# Altium PCB Embedded_board.PcbDoc (part 2 of 2)
Units mil, origin at the board's own origin, x right, y up, seen from the top; angles counter-clockwise.
Board outline 9840 x 5512.03 mil, 4 copper layers (Top Layer, Ground, Power, Bottom Layer); 264 components, 205 nets, 936 pads, 244 vias.
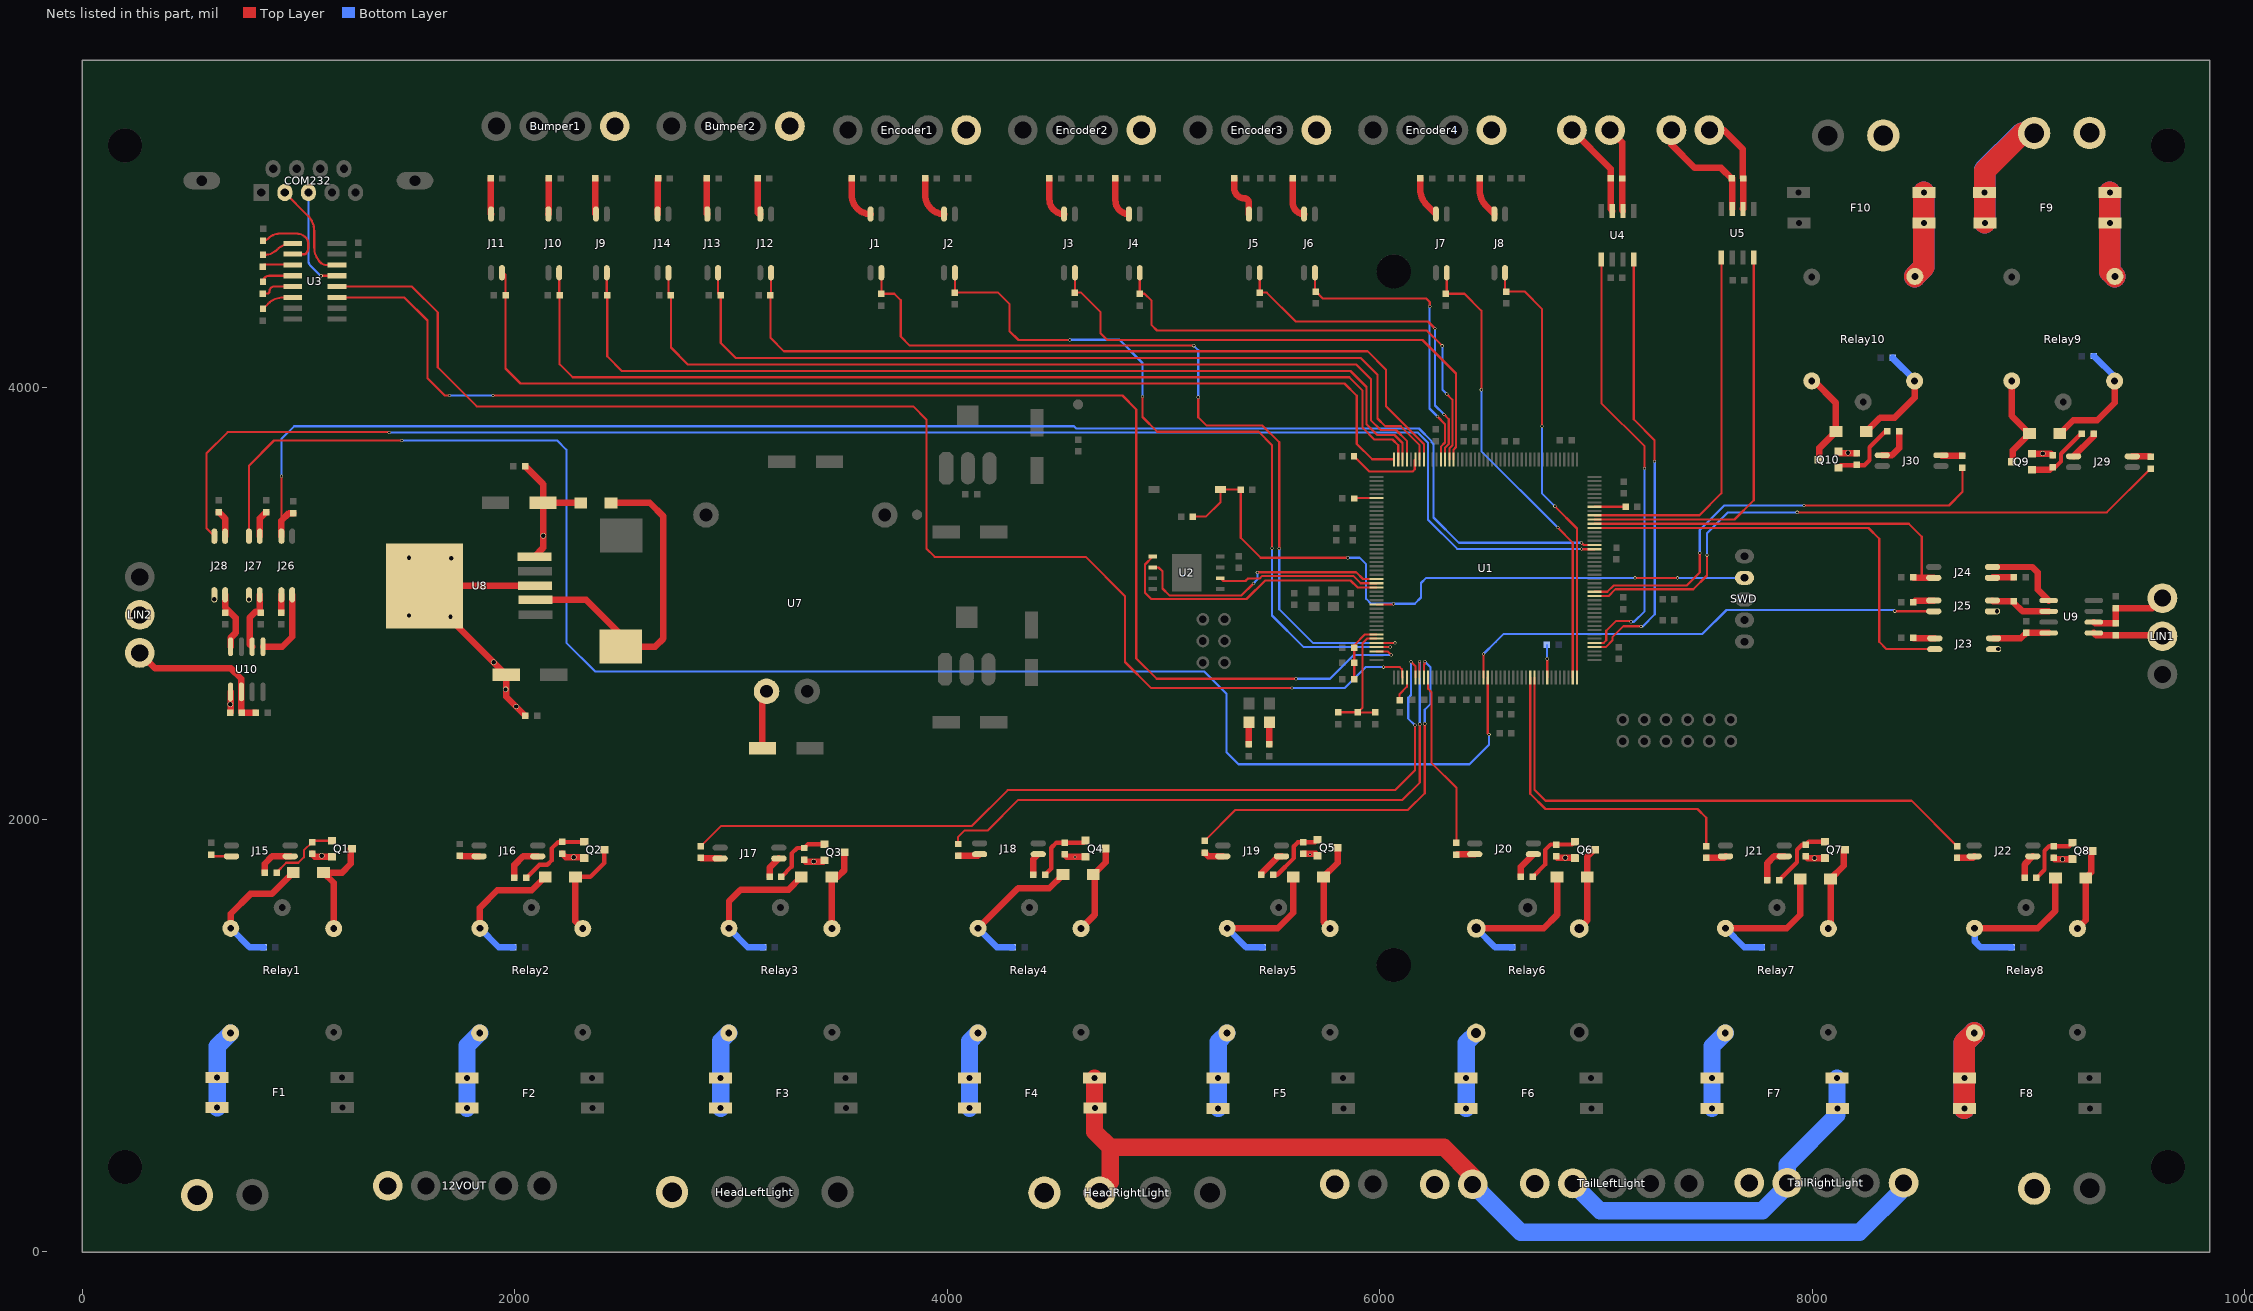
[diagram p4: the nets of this part, all layers, seen from the top]

## Via types
v1: diameter 25, hole 20, Top Layer to Bottom Layer, 133 vias
v2: diameter 15, hole 10, Top Layer to Bottom Layer, 111 vias

## Nets (pads, with @x,y where several pads share a name; then routed paths per layer and width w, separated by ;. In a path a pad name is that pad's centre, name@x,y a point inside that pad or via, vN(x,y) a via of type N, cw(c..) or ccw(c..) an arc to the next point about the centre after c; other vN are vias at no path point) (continued)
NetC19_1: C19.1 U1.81 | length 148.8
  Top Layer w10: U1.81@6774.98,2657.22 v2(6775,2744)
  Bottom Layer w10: v2@6773,2746 C19.1@6773,2808
NetC20_1: C20.1 U1.125 | length 146.2
  Top Layer w10: U1.125@6994.09,3447.2 C20.1@7129,3447.2 ; C20.1@7129,3454 C20.1@7137,3446
NetC21_2: C21.2 C22.2 R4.1 U1.39 | length 571.3
  Top Layer w10: C22.2@5809.06,2496.5 C21.2@5899.06,2496.5 5921,2518.44 5921,2817 5940.97,2836.97 U1.39@5985,2836.97 ; C21.2@5899.56,2496 R4.1@5979,2496
NetC23_1: C23.1 C24.1 R6.1 U1.38 | length 280.6
  Top Layer w10: R6.1@5882,2650 C23.1@5882,2725 C24.1@5882,2795 5882,2807 5931.65,2856.65 U1.38@5985,2856.65
NetC27_1: C27.1 U3.1 | length 144.3
  Top Layer w10: C27.1@842.47,4612 ccw(c842.47,4692.95) 899.71,4635.71 cw(c970.42,4565) 970.42,4665 U3.1@972.64,4665
NetC27_2: C27.2 U3.3 | length 144.3
  Top Layer w10: C27.2@834.94,4557.5 cw(c844.44,4557.5) 844.44,4567 970.64,4567 cw(c970.64,4565) U3.3@972.64,4565
NetC28_1: C28.1 U3.2 | length 353.1
  Top Layer w10: C28.1@835,4678 ccw(c835,4714.21) 860.61,4688.61 cw(c912.25,4636.96) 912.25,4710 989.54,4710 cw(c989.54,4648.54) 1033,4692 cw(c1006.44,4665.44) 1044,4665.44 1044,4643.56 cw(c1006.44,4643.56) 1033,4617 cw(c1028.17,4621.83) 1028.17,4615 U3.2@972.64,4615
NetC29_1: C29.1 U3.4 | length 153.6
  Top Layer w10: C29.1@835,4487 cw(c863,4487) 863,4515 U3.4@972.64,4515
NetC29_2: C29.2 U3.5 | length 156.3
  Top Layer w10: C29.2@834.94,4432.5 853.5,4432.5 ccw(c853.5,4444) 865,4444 cw(c886,4444) 886,4465 U3.5@972.64,4465
NetC30_1: C30.1 U3.6 | length 112.1
  Top Layer w10: C30.1@835,4362 858.71,4385.71 cw(c929.42,4315) U3.6@929.42,4415
NetC37_2: C37.2 LIN1.3 R87.1 U9.6 | length 409.1
  Top Layer w30: U9.6@9302.72,2913.15 9308.37,2907.5 C37.2@9405.06,2907.5 R87.1@9405.06,2977.94 ; R87.1@9405.06,2978 9574,2978 LIN1.3@9620,3024
NetC38_2: C38.2 LIN2.3 R96.2 U10.6 | length 738.4
  Top Layer w30: LIN2.3@265,2771 337,2699 687,2699 735,2651 U10.6@735,2590.51 C38.2@735,2497.44 ; C38.2@737.37,2495.06 R96.2@802.5,2495.06
NetCAN1_1: CAN1.1 R73.2 U5.7 | length 551.2
  Top Layer w30: CAN1.1@7349,5189 7349,5122 7457,5014 7578.56,5014 R73.2@7627.5,4965.06 ; U5.7@7630,4824.41 R73.2@7630,4965.06
NetCAN1_2: CAN1.2 R73.1 U5.6 | length 468.9
  Top Layer w30: CAN1.2@7525,5189 7591.58,5189 7680,5100.58 7680,4969.83 ccw(c7686.83,4969.83) R73.1@7682,4965 7682,4829.24 cw(c7675.17,4829.24) U5.6@7680,4824.41
NetCAN2_1: CAN2.1 R82.2 U4.7 | length 450.5
  Top Layer w30: CAN2.1@6889,5189 7067.5,5010.5 R82.2@7067.5,4965.06 7067.5,4832.52 ccw(c7093.11,4832.52) U4.7@7075,4814.41
NetCAN2_2: CAN2.2 R82.1 U4.6 | length 399
  Top Layer w30: CAN2.2@7065,5189 7122,5132 R82.1@7122,4965 7122,4821.65 ccw(c7132.24,4821.65) U4.6@7125,4814.41
NetCOM232_2: COM232.2 U3.14 | length 463.1
  Top Layer w10: COM232.2@936,4900 1042.71,4793.29 cw(c972,4722.58) 1072,4722.58 1072,4646.01 ccw(c1171.01,4646.01) 1101,4576 ccw(c1127.56,4602.56) 1127.56,4565 U3.14@1177.36,4565
NetCOM232_3: COM232.3 U3.13 | length 482.6
  Top Layer w10: v2(1104,4515) U3.13@1177.36,4515
  Bottom Layer w10: COM232.3@1045,4900 1045,4586.56 ccw(c1082.56,4586.56) 1056,4560 1098.88,4517.12 ccw(c1104,4522.24) v2(1104,4515)
NetD1_2: D1.2 L1.1 U8.2 | length 1562.7
  Top Layer w30: U8.2@2095,3016 2330,3016 2489,2857 L1.1@2489,2800 2649,2800 2687,2838 2687,3402 2624,3465 D1.2@2445,3465
NetD2_1: D2.1 Q1.3 Relay1.4 | length 491.1
  Top Layer w30: Relay1.4@1162,1496 1162,1708 D2.1@1115,1755 1201,1755 1241.26,1795.26 Q1.3@1241.26,1865
NetD2_2: D2.2 R43.1 Relay1.5 | length 623.7
  Top Layer w30: Relay1.5@686,1497 686,1565 777,1656 876,1656 D2.2@975,1755
  Bottom Layer w30: Relay1.5@686,1497 773,1410 R43.1@838,1410
NetD3_1: D3.1 Q2.3 Relay2.4 | length 473.8
  Top Layer w20: D3.1@2280,1735 2349,1735 2413.26,1799.26 Q2.3@2413.26,1860
  Top Layer w30: D3.1@2280,1735 2280,1530.14 Relay2.4@2314.14,1496
NetD3_2: D3.2 R48.1 Relay2.5 | length 647.1
  Top Layer w30: Relay2.5@1838.14,1497 1838.14,1592.14 1919,1673 2078,1673 D3.2@2140,1735
  Bottom Layer w30: Relay2.5@1838.14,1497 1925.14,1410 R48.1@1993,1410
NetD4_1: D4.1 Q3.3 Relay3.4 | length 393.9
  Top Layer w30: D4.1@3465,1735 D4.1@3466.29,1735 ; Relay3.4@3466.29,1496 D4.1@3466.29,1735 ; Q3.3@3524.26,1849 3524.26,1766.26 3493,1735 D4.1@3466.29,1735
NetD4_2: D4.2 R52.1 Relay3.5 | length 700.4
  Top Layer w30: Relay3.5@2990.29,1497 2990.29,1622.29 3044,1676 3266,1676 D4.2@3325,1735
  Bottom Layer w30: Relay3.5@2990.29,1497 3077.29,1410 R52.1@3148,1410
NetD5_1: D5.1 Q4.3 Relay4.4 | length 422.3
  Top Layer w30: Relay4.4@4618.43,1496 4681.26,1558.83 4681.26,1738.74 D5.1@4675,1745 4732.26,1802.26 Q4.3@4732.26,1866
NetD5_2: D5.2 R56.1 Relay4.5 | length 691.9
  Top Layer w30: Relay4.5@4142.43,1497 4327.43,1682 4472,1682 D5.2@4535,1745
  Bottom Layer w30: Relay4.5@4142.43,1497 4229.43,1410 R56.1@4303,1410
NetD6_1: D6.1 Q5.3 Relay5.4 | length 413.7
  Top Layer w30: Relay5.4@5770.57,1496 5740,1526.57 D6.1@5740,1735 5805.26,1800.26 Q5.3@5805.26,1870
NetD6_2: D6.2 R60.1 Relay5.5 | length 700.7
  Top Layer w30: Relay5.5@5294.57,1497 5528,1497 5600,1569 D6.2@5600,1735
  Bottom Layer w30: Relay5.5@5294.57,1497 5381.57,1410 R60.1@5458,1410
NetD7_1: D7.1 Q6.3 Relay6.4 | length 392.4
  Top Layer w30: Relay6.4@6922.71,1496 6960,1533.29 D7.1@6960,1735 6960,1828.74 Q6.3@6991.26,1860
NetD7_2: D7.2 R64.2 Relay6.5 | length 776.8
  Top Layer w30: Relay6.5@6446.71,1497 6758,1497 6820,1559 D7.2@6820,1735
  Bottom Layer w30: Relay6.5@6446.71,1497 6533.65,1410.06 R64.2@6612.5,1410.06
NetD8_1: D8.1 Q7.3 Relay7.4 | length 393.6
  Top Layer w30: Relay7.4@8074.86,1496 8085,1506.14 D8.1@8085,1725 8146.26,1786.26 Q7.3@8146.26,1860
NetD8_2: D8.2 R68.1 Relay7.5 | length 742.4
  Top Layer w30: Relay7.5@7598.86,1497 7882,1497 7945,1560 D8.2@7945,1725
  Bottom Layer w30: Relay7.5@7598.86,1497 7685.86,1410 R68.1@7768,1410
NetD9_1: D9.1 Q8.3 Relay8.4 | length 385.6
  Top Layer w30: Relay8.4@9227,1496 9265,1534 D9.1@9265,1730 9291.26,1756.26 Q8.3@9291.26,1855
NetD9_2: D9.2 R72.2 Relay8.5 | length 801.6
  Top Layer w30: Relay8.5@8751,1497 9044,1497 9125,1578 D9.2@9125,1730
  Bottom Layer w30: Relay8.5@8751,1497 8751,1438 8778.94,1410.06 R72.2@8922.5,1410.06
NetD10_1: D10.1 Q9.3 Relay9.4 | length 439.6
  Top Layer w30: Relay9.4@8923,4029 8923,3867 D10.1@9005,3785 8928.74,3708.74 Q9.3@8928.74,3655
NetD10_2: D10.2 R100.2 Relay9.5 | length 549.7
  Top Layer w30: D10.2@9145,3785 9207,3847 9318,3847 9399,3928 Relay9.5@9399,4028
  Bottom Layer w30: R100.2@9302.5,4144.06 Relay9.5@9399,4047.56
NetD11_1: D11.1 Q10.3 Relay10.4 | length 447.8
  Top Layer w30: Relay10.4@7998,4029 8008,4029 8110,3927 D11.1@8110,3795 8033.74,3718.74 Q10.3@8033.74,3665
NetD11_2: D11.2 R104.1 Relay10.5 | length 514.3
  Top Layer w30: D11.2@8250,3795 8314,3859 8381,3859 8474,3952 Relay10.5@8474,4028
  Bottom Layer w30: R104.1@8372,4135 8474,4033 Relay10.5@8474,4028
NetDS0_1: DS0.1 R10.2 | length 102.5
  Top Layer w30: R10.2@5490.06,2347.5 DS0.1@5490.06,2450.03
NetF1_1: F1.1 Relay1.3 | length 371
  Bottom Layer w80: F1.1@623,667.72 F1.1@623,807.72 623,951 Relay1.3@685,1013
NetF2_1: F2.1 Relay2.3 | length 372.1
  Bottom Layer w80: F2.1@1779,665 F2.1@1779,805 1779,954.86 Relay2.3@1837.14,1013
NetF3_1: F3.1 Relay3.3 | length 363.4
  Bottom Layer w80: F3.1@2952,665 F3.1@2952,805 2952,975.71 Relay3.3@2989.29,1013
NetF4_1: F4.1 Relay4.3 | length 363.9
  Bottom Layer w80: F4.1@4103,665 F4.1@4103,805 4103,974.57 Relay4.3@4141.43,1013
NetF5_1: F5.1 Relay5.3 | length 365.8
  Bottom Layer w80: F5.1@5253,664 F5.1@5253,804 5253,972.43 Relay5.3@5293.57,1013
NetF6_1: F6.1 Relay6.3 | length 367.9
  Bottom Layer w80: F6.1@6400,664 F6.1@6400,804 6400,967.29 Relay6.3@6445.71,1013
NetF7_1: F7.1 Relay7.3 | length 374.2
  Bottom Layer w80: F7.1@7537,664 F7.1@7537,804 7537,952.14 Relay7.3@7597.86,1013
NetF8_1: F8.1 Relay8.3 | length 736.1
  Top Layer w100: F8.1@8704,664 F8.1@8704,804 8704,967 Relay8.3@8750,1013
  Bottom Layer w100: F8.1@8704,664 F8.1@8704,804 8704,967 Relay8.3@8750,1013
NetF9_1: F9.1 Relay9.3 | length 795.1
  Top Layer w100: F9.1@9377,4900 F9.1@9377,4760 9377,4535 Relay9.3@9400,4512
  Bottom Layer w100: F9.1@9377,4900 F9.1@9377,4760 9377,4535 Relay9.3@9400,4512
NetF10_1: F10.1 Relay10.3 | length 810.8
  Top Layer w100: Relay10.3@8475,4512 8517,4554 F10.1@8517,4760 F10.1@8517,4900
  Bottom Layer w100: Relay10.3@8475,4512 8517,4554 F10.1@8517,4760 F10.1@8517,4900
NetJ1_2: J1.2 R13.2 | length 214.3
  Top Layer w30: R13.2@3557.5,4965.06 3557.5,4888.25 ccw(c3645,4888.25) J1.2@3645,4800.75
NetJ1_4: J1.4 R14.1 U1.40 | length 3958.9
  Top Layer w10: J1.4@3695,4529.25 R14.1@3695,4432 3755,4432 3785,4402 3785,4234 3827,4192 v2(5140,4192) ; v2(5161,3953) 5161,3861 5200,3822 5458,3822 5535,3745 v2(5535,3254) ; U1.40@5985,2817.28 v2(6070.28,2817.28)
  Bottom Layer w10: v2(5140,4192) 5161,4171 v2(5161,3953) ; v2(5535,3254) 5535,2973 5690.72,2817.28 v2(6070.28,2817.28)
NetJ2_2: J2.2 R15.2 | length 214.3
  Top Layer w30: R15.2@3897.5,4965.06 3897.5,4888.25 ccw(c3985,4888.25) J2.2@3985,4800.75
NetJ2_4: J2.4 R16.1 U1.41 | length 3530.6
  Top Layer w10: J2.4@4035,4529.25 R16.1@4035,4437 4235,4437 4287,4385 4287,4260 4329,4218 v2(4566,4218) ; v2(4903,3957) 4903,3862 4971,3794 5440,3794 5502,3732 v2(5502,3255) ; U1.41@5985,2797.6 v2(6048.6,2797.6)
  Bottom Layer w10: v2(4566,4218) 4567,4219 4796,4219 4903,4112 v2(4903,3957) ; v2(5502,3255) 5502,2944 5648.4,2797.6 v2(6048.6,2797.6)
NetJ3_2: J3.2 R17.2 | length 202.8
  Top Layer w30: R17.2@4472.5,4965.06 4472.5,4868.25 ccw(c4540,4868.25) J3.2@4540,4800.75
NetJ3_4: J3.4 R18.1 U1.162 | length 2469.4
  Top Layer w10: J3.4@4590,4529.25 R18.1@4590,4437 4619,4437 4709,4347 4709,4248 4739,4218 6198,4218 6353,4063 6353,3723 6341.91,3711.91 U1.162@6341.91,3666.32
NetJ4_2: J4.2 R19.2 | length 200
  Top Layer w30: R19.2@4777.5,4965.06 4777.5,4863.25 ccw(c4840,4863.25) J4.2@4840,4800.75
NetJ4_4: J4.4 R20.1 U1.163 | length 2211.1
  Top Layer w10: J4.4@4890,4529.25 R20.1@4890,4432 4912,4432 4945,4399 4945,4287 4970,4262 6218,4262 v2(6289,4191) ; v2(6310,3968) 6336,3942 6336,3730.04 6322.22,3716.27 U1.163@6322.22,3666.32
  Bottom Layer w10: v2@6290,4191 6290,3988 v2(6310,3968)
NetJ5_2: J5.2 R21.2 | length 202.8
  Top Layer w30: R21.2@5327.5,4965.06 5327.5,4919.5 ccw(c5374,4919.5) 5374,4873 cw(c5374,4852) 5395,4852 J5.2@5395,4800.75
NetJ5_4: J5.4 R22.1 U1.164 | length 1602.6
  Top Layer w10: J5.4@5445,4529.25 R22.1@5445,4437 5478,4437 5611,4304 6223,4304 v2(6256,4271) ; v2(6297,3874) 6319,3852 6319,3737.08 6302.54,3720.62 U1.164@6302.54,3666.32
  Bottom Layer w10: v2@6256,4264 6256,3915 v2(6297,3874)
NetJ6_2: J6.2 R23.2 | length 194.3
  Top Layer w30: R23.2@5597.5,4965.06 5597.5,4853.25 ccw(c5650,4853.25) J6.2@5650,4800.75
NetJ6_4: J6.4 R24.1 U1.165 | length 1401.4
  Top Layer w10: J6.4@5700,4529.25 5700,4447 ccw(c5705,4447) R24.1@5705,4442 5737,4410 6215,4410 6231,4394 v2(6231,4373) ; v2(6267,3864) 6302,3829 6302,3744.12 6282.85,3724.98 U1.165@6282.85,3666.32
  Bottom Layer w10: v2@6230,4373 6230,3901 v2(6267,3864)
NetJ7_2: J7.2 R25.2 | length 190
  Top Layer w30: R25.2@6187.5,4965.06 6187.5,4914.67 ccw(c6287.5,4914.67) 6216.79,4843.96 J7.2@6260,4800.75
NetJ7_4: J7.4 R26.1 U1.87 | length 2169.4
  Top Layer w10: J7.4@6310,4529.25 6310,4437 cw(c6305,4437) R26.1@6305,4432 6392,4432 6470,4354 v2(6470,3988) ; v2(6823,3351) 6893.09,3280.91 U1.87@6893.09,2657.22
  Bottom Layer w10: v2(6470,3988) 6470,3704 v2(6823,3351)
NetJ8_2: J8.2 R27.2 | length 188
  Top Layer w30: R27.2@6462.5,4965.06 6462.5,4909.67 ccw(c6562.5,4909.67) 6491.79,4838.96 J8.2@6530,4800.75
NetJ8_4: J8.4 R28.1 U1.88 | length 2060.4
  Top Layer w10: J8.4@6580,4529.25 6580,4447 ccw(c6585,4447) R28.1@6585,4442 6670,4442 6750,4362 v2(6750,3819) ; v2(6810,3449) 6912.78,3346.22 U1.88@6912.78,2657.22
  Bottom Layer w10: v2(6750,3819) 6750,3509 v2(6810,3449)
NetJ9_2: J9.2 R40.2 | length 165.7
  Top Layer w30: R40.2@2372.5,4965.06 2372.5,4803.25 ccw(c2375,4803.25) J9.2@2375,4800.75
NetJ9_4: J9.4 R39.1 U1.174 | length 4408.8
  Top Layer w10: J9.4@2425,4529.25 2425,4427 ccw(c2427,4427) R39.1@2427,4425 2427,4143 2495,4075 5865,4075 5939,4001 5939,3828 5988,3779 6068,3779 6105.69,3741.31 U1.174@6105.69,3666.32
NetJ10_2: J10.2 R38.2 | length 165.7
  Top Layer w30: J10.2@2155,4800.75 ccw(c2155,4803.25) 2157.5,4803.25 R38.2@2157.5,4965.06
NetJ10_4: J10.4 R37.1 U1.175 | length 4624.2
  Top Layer w10: J10.4@2205,4529.25 2205,4427 ccw(c2207,4427) R37.1@2207,4425 2207,4106 2267,4046 5859,4046 5921,3984 5921,3812 5975,3758 6059,3758 6086,3731 U1.175@6086,3666.32
NetJ11_2: J11.2 R36.2 | length 165.7
  Top Layer w30: R36.2@1887.5,4965.06 1887.5,4803.25 ccw(c1890,4803.25) J11.2@1890,4800.75
NetJ11_4: J11.4 R35.1 U1.176 | length 4866.7
  Top Layer w10: J11.4@1940,4529.25 cw(c1940,4512.25) 1957,4512.25 R35.1@1957,4425 1957,4086 2026,4017 5837,4017 5894,3960 5894,3737 5964.68,3666.32 U1.176@6066.32,3666.32
NetJ12_2: J12.2 R34.2 | length 171.5
  Top Layer w30: R34.2@3122.5,4965.06 3122.5,4813.25 ccw(c3135,4813.25) J12.2@3135,4800.75
NetJ12_4: J12.4 R33.1 U1.169 | length 3698.1
  Top Layer w10: J12.4@3185,4529.25 3185,4428 cw(c3182,4428) R33.1@3182,4425 3182,4228 3244,4166 5944,4166 6029,4081 6029,3912 6204.11,3736.89 U1.169@6204.11,3666.32
NetJ13_2: J13.2 R32.2 | length 165.7
  Top Layer w30: R32.2@2887.5,4965.06 2887.5,4803.25 ccw(c2890,4803.25) J13.2@2890,4800.75
NetJ13_4: J13.4 R31.1 U1.170 | length 3943.8
  Top Layer w10: J13.4@2940,4529.25 2940,4437 ccw(c2952,4437) R31.1@2952,4425 2952,4204 3021,4135 5912,4135 5990,4057 5990,3855 6026,3819 6097,3819 6184.43,3731.57 U1.170@6184.43,3666.32
NetJ14_2: J14.2 R30.2 | length 165.7
  Top Layer w30: J14.2@2660,4800.75 2660,4962.56 cw(c2662.5,4962.56) R30.2@2662.5,4965.06
NetJ14_4: J14.4 R29.1 U1.173 | length 4132.3
  Top Layer w10: J14.4@2710,4529.25 2710,4437 ccw(c2722,4437) R29.1@2722,4425 2722,4183 2800,4105 5892,4105 5959,4038 5959,3847 6004,3802 6075,3802 6125.37,3751.63 U1.173@6125.37,3666.32
NetJ15_2: J15.2 R44.2 | length 97.4
  Top Layer w10: R44.2@594.94,1837.5 602.44,1830 J15.2@689.25,1830
NetJ15_3: J15.3 R41.1 | length 172.8
  Top Layer w30: R41.1@843,1755 843,1796 877,1830 J15.3@960.75,1830
NetJ16_2: J16.2 R45.2 | length 86.8
  Top Layer w30: R45.2@1747.44,1830 J16.2@1834.25,1830
NetJ16_3: J16.3 R46.1 | length 184.3
  Top Layer w30: R46.1@1998,1730 1998,1790 2038,1830 J16.3@2105.75,1830
NetJ17_2: J17.2 R49.2 | length 86.8
  Top Layer w30: R49.2@2862.44,1820 J17.2@2949.25,1820
NetJ17_3: J17.3 R50.1 | length 102.7
  Top Layer w30: R50.1@3178,1735 3178,1777.25 J17.3@3220.75,1820
NetJ18_2: J18.2 R53.2 | length 102.4
  Top Layer w30: R53.2@4049.94,1832.5 4141.75,1832.5 J18.2@4149.25,1840
NetJ18_3: J18.3 R54.1 | length 104.4
  Top Layer w30: R54.1@4398,1745 4398,1817.25 J18.3@4420.75,1840
NetJ19_2: J19.2 R57.2 | length 91.6
  Top Layer w30: R57.2@5189.94,1847.5 5207.44,1830 J19.2@5274.25,1830
NetJ19_3: J19.3 R58.1 | length 131.8
  Top Layer w30: R58.1@5453,1745 5453,1751.55 5531.45,1830 J19.3@5545.75,1830
NetJ20_2: J20.2 R61.2 | length 81.8
  Top Layer w30: R61.2@6357.44,1840 J20.2@6439.25,1840
NetJ20_3: J20.3 R62.1 | length 128.9
  Top Layer w30: R62.1@6653,1735 6653,1782.25 J20.3@6710.75,1840
NetJ21_2: J21.2 R65.1 | length 92.2
  Top Layer w30: R65.1@7510,1823 7592.25,1823 J21.2@7599.25,1830
NetJ21_3: J21.3 R66.1 | length 169.6
  Top Layer w30: R66.1@7793,1720 7793,1799 7824,1830 J21.3@7870.75,1830
NetJ22_2: J22.2 R69.2 | length 82.4
  Top Layer w30: R69.2@8669.94,1822.5 8741.75,1822.5 J22.2@8749.25,1830
NetJ22_3: J22.3 R70.2 | length 115.8
  Top Layer w30: R70.2@8982.5,1730.06 8982.5,1791.75 J22.3@9020.75,1830
NetJ23_1: J23.1 R83.2 | length 98.2
  Top Layer w30: R83.2@8469.29,2838.15 J23.1@8567.48,2838.15
NetJ23_2: J23.2 U1.120 | length 2085
  Top Layer w10: U1.120@6994.09,3348.78 8260.22,3348.78 8310,3299 8310,2822 8343.85,2788.15 J23.2@8567.48,2788.15
NetJ23_4: J23.4 R85.1 U9.4 | length 265.1
  Top Layer w30: J23.4@8838.98,2838.15 8965.15,2838.15 R85.1@8990,2863 8990.15,2863.15 U9.4@9093.74,2863.15
NetJ24_1: J24.1 R86.1 | length 97.2
  Top Layer w30: J24.1@8835.83,3120 R86.1@8933,3120
NetJ24_2: J24.2 U9.1 | length 370.3
  Top Layer w30: J24.2@8833.98,3168.15 9017.85,3168.15 9042.89,3143.11 9042.89,3064 U9.1@9093.74,3013.15
NetJ24_4: J24.4 R84.2 U1.121 | length 1821
  Top Layer w10: U1.121@6994.09,3368.46 8446.54,3368.46 8507,3308 8507,3118.15
  Top Layer w30: R84.2@8469.29,3118.15 8507,3118.15 J24.4@8562.48,3118.15
NetJ25_1: J25.1 R89.2 | length 86.8
  Top Layer w30: R89.2@8475.71,3013.15 J25.1@8562.48,3013.15
NetJ25_2: J25.2 U1.66 | length 2278.8
  Top Layer w10: U1.66@6479.7,2657.22 6480,2657.52 v2(6480,2766) ; v2@6479.7,2766 v2@6479.7,2767 ; v2@8382.15,2963.15 J25.2@8562.48,2963.15
  Bottom Layer w10: v2(6480,2766) 6536,2822 6537,2822 6574,2859 7493,2859 7603.53,2969.53 8376.47,2969.53 v2(8382,2964)
NetJ25_4: J25.4 R88.1 U9.2 | length 284.4
  Top Layer w30: J25.4@8833.98,3013.15 8837.13,3010 R88.1@8933,3010 8933,3003.32 8973.17,2963.15 U9.2@9093.74,2963.15
NetJ26_1: J26.1 R95.1 | length 82.3
  Top Layer w30: R95.1@920,2957 J26.1@920,3039.25
NetJ26_2: J26.2 U10.1 | length 347.5
  Top Layer w30: U10.1@835,2799.49 923.49,2799.49 970,2846 J26.2@970,3039.25
NetJ26_4: J26.4 R90.2 U1.116 | length 7048.3
  Top Layer w10: 920,3382 v2(920,3588) v2@920,3590 ; v2(6933,3280) 6942.96,3270.04 U1.116@6994.09,3270.04
  Top Layer w30: J26.4@920,3310.75 920,3382 955.5,3417.5 R90.2@974.94,3417.5
  Bottom Layer w10: v2(920,3588) 920,3760 979,3819 4586.35,3819 4596.85,3808.5 6181.54,3808.5 6240,3750.04 6240,3745 6249,3736 6249,3397 6366,3280 v2(6933,3280)
NetJ27_1: J27.1 R91.2 | length 124.2
  Top Layer w30: J27.1@820,3310.75 820,3392.56 R91.2@849.94,3422.5
NetJ27_2: J27.2 U1.67 | length 7762.3
  Top Layer w10: J27.2@770,3310.75 770,3637 886,3753 v2(1477,3753) ; U1.67@6499.39,2657.22 6499.39,2399.61 v2(6506,2393)
  Bottom Layer w10: v2(1477,3753) 2196,3753 2238,3711 2238,2818 2371.53,2684.47 5188.53,2684.47 5291,2582 5291,2312 5347,2256 6415,2256 6506,2347 v2(6506,2393)
NetJ27_4: J27.4 R94.1 U10.2 | length 274.7
  Top Layer w30: U10.2@785,2799.49 773,2811.49 773,2933 802,2962 820,2962 J27.4@820,3039.25
NetJ28_1: J28.1 R92.2 | length 124.2
  Top Layer w30: R92.2@629.94,3422.5 660,3392.44 J28.1@660,3310.75
NetJ28_2: J28.2 U1.115 | length 7290.9
  Top Layer w10: J28.2@610,3310.75 574,3346.75 574,3694 672,3792 v2@1419,3792 ; v2(6933,3252) 6934.65,3250.35 U1.115@6994.09,3250.35
  Bottom Layer w10: v2(1419,3790) 6176,3790 6223,3743 6223,3387 6358,3252 v2(6933,3252)
NetJ28_4: J28.4 R93.1 U10.4 | length 269.2
  Top Layer w30: J28.4@660,3039.25 660,2982 708,2934 708,2863 685,2840 U10.4@685,2799.49
NetJ29_2: J29.2 R97.2 | length 81.8
  Top Layer w30: J29.2@9480.75,3680 R97.2@9562.56,3680
NetJ29_3: J29.3 R98.1 | length 143.4
  Top Layer w30: J29.3@9209.25,3680 9302,3772.75 R98.1@9302,3785
NetJ30_2: J30.2 R101.1 | length 96.3
  Top Layer w30: J30.2@8598.75,3682 R101.1@8695,3682
NetJ30_3: J30.3 R102.2 | length 168.6
  Top Layer w30: J30.3@8324.25,3685 8369,3685 8402.5,3718.5 R102.2@8402.5,3794.94
NetPower_1: Power.1 R7.2 | length 102.5
  Top Layer w30: R7.2@5395.06,2347.5 Power.1@5395.06,2450.03
NetQ1_2: Q1.2 R41.2 R42.2 | length 335.7
  Top Layer w10: R41.2@897.5,1754.94 942.56,1800 998,1800 1024,1826 1024,1857.44 R42.2@1062.06,1895.5 1068.97,1902.4 Q1.2@1153.74,1902.4
NetQ2_2: Q2.2 R46.2 R47.2 | length 368.5
  Top Layer w20: R46.2@2052.5,1729.94 2113.56,1791 2150,1791 2170,1811 2170,1866 2200.5,1896.5 R47.2@2219.06,1896.5 Q2.2@2319.84,1896.5
NetQ3_2: Q3.2 R50.2 R51.2 | length 297.5
  Top Layer w20: R50.2@3232.5,1734.94 3280,1782.44 3280,1843 3305.5,1868.5 R51.2@3338.06,1868.5 3355.97,1886.4 Q3.2@3431.74,1886.4
NetQ4_2: Q4.2 R54.2 R55.2 | length 295.4
  Top Layer w20: R54.2@4452.5,1744.94 4481,1773.44 4481,1870 4504.5,1893.5 R55.2@4543.06,1893.5 Q4.2@4629.84,1893.5
NetQ5_2: Q5.2 R58.2 R59.2 | length 304.8
  Top Layer w20: R58.2@5507.5,1744.94 5525.94,1744.94 5603,1822 5603,1877 5621.5,1895.5 R59.2@5647.06,1895.5 5700.84,1895.5 Q5.2@5712.74,1907.4
NetQ6_2: Q6.2 R62.2 R63.2 | length 302.5
  Top Layer w20: R62.2@6707.5,1734.94 6765,1792.44 6765,1859 6790.5,1884.5 R63.2@6816.06,1884.5 6890.84,1884.5 Q6.2@6903.74,1897.4
NetQ7_2: Q7.2 R66.2 R67.2 | length 318.5
  Top Layer w20: R66.2@7847.5,1719.94 7930,1802.44 7930,1860 7954.5,1884.5 R67.2@7971.06,1884.5 7983.97,1897.4 Q7.2@8058.74,1897.4
NetQ8_2: Q8.2 R70.1 R71.1 | length 285.6
  Top Layer w20: R70.1@9037,1730 9075,1768 9075,1856 9096,1877 R71.1@9118,1877 9188.34,1877 Q8.2@9203.74,1892.4
NetQ9_2: Q9.2 R98.2 R99.2 | length 318.3
  Top Layer w20: R99.2@9111.94,3630.5 9125.5,3630.5 9151,3656 9151,3691.88 R98.2@9244.18,3785.06
  Top Layer w30: Q9.2@9016.26,3617.6 9099.03,3617.6 R99.2@9111.94,3630.5
NetQ10_2: Q10.2 R102.1 R103.1 | length 331.2
  Top Layer w20: Q10.2@8121.26,3627.6 8132.66,3639 8242,3639 8265,3662 8265,3722 8338,3795 R102.1@8348,3795
NetR5_1: R5.1 U1.171 | length 357.8
  Top Layer w10: R5.1@5881,3680 5951,3610 6152,3610 6162.06,3620.06 U1.171@6162.06,3663.63
NetR8_1: R8.1 U1.48 | length 119
  Top Layer w10: R8.1@6092,2552 6092,2581 6125.37,2614.37 U1.48@6125.37,2657.22
NetR9_1: R9.1 U1.6 | length 103.7
  Top Layer w10: R9.1@5882,3485 5883.57,3486.57 U1.6@5985,3486.57
NetR49_1: R49.1 U1.50 | length 4051
  Top Layer w10: R49.1@2860,1877 2954,1971 4114,1971 4279,2136 6071,2136 6163,2228 v2(6163,2436) v2@6164,2437 ; v2(6145,2730) 6164.74,2710.26 U1.50@6164.74,2657.22
  Bottom Layer w10: v2(6145,2730) 6145,2576.14 6132,2563.14 6132,2467 v2(6163,2436)
NetR53_1: R53.1 U1.51 | length 2905.1
  Top Layer w10: R53.1@4050,1887 4050,1920 4079,1949 4186,1949 4328,2091 6105,2091 6185,2171 v2(6185,2441) ; U1.51@6184.43,2657.22 v2(6184.43,2730.57)
  Bottom Layer w10: v2(6184.43,2730.57) 6185,2730 v2(6185,2441)
NetR57_1: R57.1 U1.52 | length 1816.3
  Top Layer w10: R57.1@5190,1902 5333,2045 6131,2045 6208,2122 v2(6208,2443) ; U1.52@6204.11,2657.22 6204.11,2717.11 6208,2721 v2(6208,2731)
  Bottom Layer w10: v2(6208,2443) 6208,2508 6235.5,2535.5 6235.5,2703.5 v2(6208,2731)
NetR61_1: R61.1 U1.53 | length 819.6
  Top Layer w10: U1.53@6223.8,2657.22 6223.8,2605.2 6239,2590 6239,2263 6355,2147 R61.1@6355,1892
NetR65_2: R65.2 U1.77 | length 1528.6
  Top Layer w10: U1.77@6696.24,2657.22 6696.24,2119.76 6767,2049 7470,2049 7510.06,2008.94 R65.2@7510.06,1877.5
NetR69_1: R69.1 U1.78 | length 2581.4
  Top Layer w10: U1.78@6715.93,2657.22 6715.93,2138.07 6767,2087 8460,2087 R69.1@8670,1877
NetR97_1: R97.1 U1.104 | length 2929.2
  Top Layer w10: U1.104@6994.09,3033.82 7058.82,3033.82 7090,3065 7450,3065 7514,3129 v2(7514,3223) ; v2(7931,3421) 9363,3421 R97.1@9565,3623
  Bottom Layer w10: v2(7514,3223) 7514,3324 7611,3421 v2(7931,3421)
NetR101_2: R101.2 U1.105 | length 2119.4
  Top Layer w10: U1.105@6994.09,3053.5 7052.5,3053.5 7081,3082 7419,3082 7480,3143 v2(7480,3233) ; v2(7962,3453) 8633,3453 8694.94,3514.94 R101.2@8694.94,3627.5
  Bottom Layer w10: v2(7480,3233) 7480,3339 7594,3453 v2(7962,3453)
NetU1_92: U1.92 U4.4 | length 2032
  Top Layer w10: U1.92@6994.09,2797.6 7045.6,2797.6 7076,2828 7076,2843 7127,2894 v2@7209,2894 ; U4.4@7175,4590 7175,3851 7271,3755 v2(7271,3656)
  Bottom Layer w10: v2(7209,2893) 7216,2893 7272,2949 7272,3655 v2(7271,3656) ; v2@7272,3656 v2@7272,3657
NetU1_93: U1.93 U4.1 | length 2027.1
  Top Layer w10: U1.93@6994.09,2817.28 7036.28,2817.28 7048,2829 7048,2874 7092,2918 v2@7159,2918 ; U4.1@7025,4590 7025,3926 7225,3726 v2(7225,3624)
  Bottom Layer w10: v2(7162,2915) 7176,2915 7225,2964 v2(7225,3624) ; v2@7226,3624 v2@7226,3626
NetU1_122: U1.122 U5.4 | length 1895.6
  Top Layer w10: U1.122@6994.24,3388 7641,3388 7730,3477 U5.4@7730,4600
NetU1_123: U1.123 U5.1 | length 1718.8
  Top Layer w10: U1.123@6994.09,3407.83 7478.83,3407.83 7580,3509 U5.1@7580,4600
PGND: 12VOUT.1 "12V OUT.2" Bumper1.1 Bumper2.1 C33.1 C34.1 C37.1 C38.1 Cap3.2 Cap4.2 Cap5.2 D1.1 Encoder1.4 Encoder2.4 Encoder3.4 Encoder4.4 HeadLeftLight.1 HeadRightLight.1 Horn.1 J23.3 J25.3 J27.3 J28.3 LIN1.2 LIN2.2 MidLeftLight.1 MidRightLight.1 PowerIN.1 Q1.1 Q2.1 Q3.1 Q4.1 Q5.1 Q6.1 Q7.1 Q8.1 Q9.1 Q10.1 R42.1 R47.1 R51.1 R55.1 R59.1 R63.1 R67.1 R71.2 R99.1 R103.2 TailLeftLight.1 TailRightLight.1 U7.1 U8.0 U8.3 U8.5 U9.5 U10.5 WarningLight.1 | length 3559.3
  Top Layer w30: C38.1@685,2497 U10.5@685,2590.51 ; R42.1@1062,1841 1075.4,1827.6 Q1.1@1153.74,1827.6 ; C34.1@2047,3635 2130.24,3551.76 Cap4.2@2130.24,3465 ; C33.1@2048,2480 1959.76,2568.24 Cap3.2@1959.76,2670 v1(1902.76,2727) 1582,3047.76 U8.0@1582,3081 U8.3@2092,3081 ; U8.5@2090,3216 2130.24,3256.24 Cap4.2@2130.24,3465 ; R47.1@2219,1842 2235,1826 v1(2272,1826) Q2.1@2317.34,1826 ; D1.1@2305,3465 Cap4.2@2130.24,3465 ; Cap5.2@3144.76,2330 3144.76,2573.76 U7.1@3164,2593 ; R51.1@3338,1814 3346,1806 v1(3383,1806) 3426.14,1806 Q3.1@3431.74,1811.6 ; R55.1@4543,1839 4553.4,1828.6 Q4.1@4639.74,1828.6 ; R59.1@5647,1841 5704.34,1841 Q5.1@5712.74,1832.6 ; R63.1@6816,1830 6822,1824 v1(6858,1824) 6902.34,1824 Q6.1@6903.74,1822.6 ; R67.1@7971,1830 7979,1822 v1(8011,1822) 8058.14,1822 Q7.1@8058.74,1822.6 ; Q10.1@8121.26,3702.4 8129.16,3694.5 R103.2@8207.06,3694.5 ; Q9.1@9016.86,3693 v1(9066,3693) 9104,3693 R99.1@9112,3685 ; R71.2@9117.94,1822.5 9122.84,1817.6 Q8.1@9203.74,1817.6 ; U9.5@9302.72,2863.15 9312.87,2853 C37.1@9405,2853 LIN1.2@9615,2853
  other v1: 9158,1816 1107,1832 2006,2523 684,2534 1957,2602 8860,2789 1702,2938 1510,2944 8855,2963 770,3018 610,3019 1706,3208 1510,3211 2131,3313 8166,3696
  other v2: 4590,1827 5678,1839
REARLIGHT: F7.2 TailLeftLight.2 TailRightLight.2 | length 1684.9
  Bottom Layer w80: TailLeftLight.2@6893,317 7018.9,191.1 7770,191.1 7885,306.1 TailRightLight.2@7885,320 7885,404 8115,634 F7.2@8115,804
RESET: C18.1 R1.1 RST.1 SWD.2 U1.31 | length 3248.7
  Top Layer w10: C18.1@5136,3401 5196,3401 5264,3469 RST.1@5264,3526 R1.1@5357,3526 5357,3303 5449,3211 v2(5852,3211) ; U1.31@5985,2994.45 6060.45,2994.45 v2(6064,2998) ; v2(7181,3118) v2(7377,3118)
  Bottom Layer w10: v2(5852,3211) 5907,3211 5937,3181 5937,3021 5960,2998 v2(6064,2998) 6162,2998 6191,3027 6191,3094 6215,3118 v2(7181,3118) ; v2(7377,3118) SWD.2@7687,3118
RIGHTLIGHT: F4.2 HeadRightLight.2 MidRightLight.2 TailRightLight.5 | length 4545.3
  Top Layer w80: F4.2@4681,805 4681,667 4681,556 4753,484 ; HeadRightLight.2@4705,274 4753,322 4753,484 ; MidRightLight.2@6430,313 6430,351 6297,484 4753,484
  Bottom Layer w80: MidRightLight.2@6430,313 6652,91 8219,91 8423,295 TailRightLight.5@8423,320
SPI5_MISO_F8: U1.26 U2.2 | length 750.1
  Top Layer w10: U2.2@5263.5,3116 5275.5,3104 5380,3104 5383,3107 ; 5383.04,3107 5391.04,3115 5445,3115 5457,3127 5878,3127 5912.13,3092.87 U1.26@5985,3092.87
SPI5_MOSI_F9: U1.27 U2.5 | length 1314.3
  Top Layer w10: U2.5@4950.5,3216 4914,3179.5 4914,3049 4943,3020 5384,3020 5470,3106 5865,3106 5897.81,3073.19 U1.27@5985,3073.19
SPI5_SCK_F7: U1.25 U2.6 | length 1210.5
  Top Layer w10: U2.6@4950.5,3166 4977,3166 4995,3148 4995,3069 5027,3037 5361.04,3037 v2(5416,3091.96) ; v2@5434,3144 5891,3144 5922.44,3112.56 U1.25@5985,3112.56
  Bottom Layer w10: v2(5416,3091.96) 5434,3109.96 v2(5434,3143)
U2_RX_A2: U1.42 U3.11 | length 6558.1
  Top Layer w10: U3.11@1177.36,4415 1489,4415 1596,4308 1596,4041 1676,3961 v2(1698,3961) ; v2(1899,3961) 4810,3961 4874,3897 4874,2745 4968,2651 v2(5613,2651) ; U1.42@5985,2777.91 6036.09,2777.91 v2(6053,2761)
  Bottom Layer w10: v2(1698,3961) v2(1899,3961) ; v2(5613,2651) 5770,2651 5880,2761 v2(6053,2761)
U2_TX_A3: U1.47 U3.12 | length 6453.9
  Top Layer w10: U3.12@1177.36,4465 1524,4465 1643,4346 1643,4092 1824,3911 3842,3911 3903,3850 3903,3254 3942,3215 4640,3215 4822,3033 4822,2729 4943,2608 v2(5594,2608) ; v2(6018,2705) 6092.68,2705 6103,2694.67 6103,2659.91 U1.47@6105.69,2657.22
  Bottom Layer w10: v2(5594,2608) 5837,2608 5934,2705 v2(6018,2705)
WARN: F9.2 WarningLight.2 | length 1084.5
  Top Layer w100: F9.2@8799,4760 8799,5001 8973,5175 WarningLight.2@9027,5175
  Bottom Layer w100: F9.2@8799,4760 8799,5005 8969,5175 WarningLight.2@9027,5175
pads on no net: COM232.0 COM232.1 COM232.4 COM232.6 COM232.7 COM232.8 COM232.9 Relay1.2 Relay2.2 Relay3.2 Relay4.2 Relay5.2 Relay6.2 Relay7.2 Relay8.2 Relay9.2 Relay10.2 U1.1 U1.2 U1.3 U1.4 U1.5 U1.7 U1.9 U1.10 U1.11 U1.12 U1.13 U1.16 U1.17 U1.18 U1.19 U1.20 U1.21 U1.28 U1.43 U1.44 U1.54 U1.55 U1.56 U1.59 U1.60 U1.63 U1.64 U1.65 U1.68 U1.69 U1.70 U1.73 U1.74 U1.75 U1.76 U1.89 U1.94 U1.95 U1.96 U1.97 U1.98 U1.99 U1.100 U1.101 U1.106 U1.107 U1.108 U1.109 U1.110 U1.111 U1.112 U1.119 U1.128 U1.129 U1.130 U1.131 U1.132 U1.133 U1.134 U1.138 U1.142 U1.143 U1.144 U1.145 U1.146 U1.147 U1.150 U1.151 U1.152 U1.153 U1.154 U1.155 U1.156 U1.157 U1.160 U1.161 U1.167 U1.168 U2.9 U3.7 U3.8 U3.9 U3.10 U4.5 U5.5 U9.3 U9.7 U10.3 U10.7

## Polygon pours and split planes (outlines as drawn)
GND on Ground (split plane): 410 vertices, not listed, extent 394.07,1740.07 9613.93,5292.93
PGND on Ground (split plane): 9818.87,20.06 19.07,20.06 19.07,5491.9 9818.87,5491.9
MCU_3V3 on Power (split plane): 7983.93,2278.24 7928.76,2223.07 5185.24,2223.07 4998.66,2409.66 4996.37,2411.53 4993.77,2412.93 4990.94,2413.78 4988,2414.07 4473.24,2414.07 4334.07,2553.24 4334.07,2762 4333.78,2764.94 4332.93,2767.77 4331.53,2770.37 4329.66,2772.66 4283.66,2818.66 4281.37,2820.53 4278.77,2821.93 4275.94,2822.78 4273,2823.07 4056.24,2823.07 3996.07,2883.24 3996.07,3027.76 4081.24,3112.93 4225,3112.93 4227.94,3113.22 4230.77,3114.07 4233.37,3115.47 4235.66,3117.34 4381.24,3262.93 4796,3262.93 4798.94,3263.22 4801.77,3264.07 4804.37,3265.47 4806.66,3267.34 4808.53,3269.63 4809.93,3272.23 4810.78,3275.06 4811.07,3278 4811.07,3914.93 7983.93,3914.93
5V on Power (split plane): 159 vertices, not listed, extent 2760.07,2283.07 7833.93,5292.93
5V_2 on Power (split plane): 583 vertices, not listed, extent 577.07,1695.07 9625.93,3724.93
3V3 on Power (split plane): 405 vertices, not listed, extent 458.07,1724.07 9538.93,5056.93
12V on Power (split plane): 9818.87,20.06 19.07,20.06 19.07,5491.9 9818.87,5491.9

## Keep-outs
Keep-Out Layer:
  lines w10: -1.03,1.03 -1.03,4911.01 -1.03,5512 9838.97,5512 9838.97,-0.03 0.03,-0.03

## Other copper
Ground (plane layer: these items are gaps in the copper):
  lines w30: 379,4136 2783,4136 2787,4132 2787,3179 2792,3174 3857,3174 3859,3172 3859,2237 3860,2236 2908,2236 2897,2247 2897,2418 2894,2421 2760,2421 2758,2423 1360,2423 1357,2426 1357,2832 1356,2833 1356,3542 1355,3543 1318,3543 1317,3544 544,3544 537,3537 537,3150 534,3147 1135,3147 1135,2325.94 1132.06,2323 501,2323 499,2325 499,2023 500,2022 500,1779 506,1773 793,1773 794,1774 794,2025 796,2027 1612,2027 1612,1790 1973,1790 1973,2032 2757,2032 2757,1726 2756,1725 3073,1725 3075,1727 3075,2033 3078,2036 3933,2036 3935,2034 3935,1744 4278,1744 4279,1745 4279,2043 4280,2044 5066,2044 5066,1751 5064,1749 5368,1749 5368,2053 5416,2053 6259,2053 6259,1744 6261,1742 6573,1742 6574,1741 6574,2048 6578,2052 7442,2052 7444,2054 7444,1751 7445,1750 7763,1750 7764,1749 7764,1781 7764,2061 7762,2063 8358,2063 8359,2062 8359,1763 8874,1763 8877,1760 8877,2102 8873,2106 8730,2106 8730,2713 8731,2712 8731,3324 8727,3328 9626,3328 9629,3325 9629,3504 9629,3733 9364,3733 9361,3736 9361,3560 9360,3559 8777,3559 8776,3560 8776,3581 8776,3735 8773,3738 8466,3738 8465,3739 8465,3580 8467,3578 7796,3578 7789,3585 7789,4897 7790,4898 7750,4898 7747,4901 7747,5078 7847,5078 7848,5079 7848,5307 7847,5308 6739,5308 6739,4672 6604,4672 6603,4671 1752,4671 1752,5072 379,5072 379,4136
Power (plane layer: these items are gaps in the copper):
  lines w30: 792,1719 792,2075 786,2081 566,2081 562,2077 562,3188 563,3189 610,3189 990,3189 1044,3243 1044,3714 2624,3714 2624,2897 ; 1062,2762 1057,2767 1439,2767 1441,2765 1451,2765 1448,2768 1947,2768 1948,2767 1948,2876 ; 1065,2770 1065,1711 1063,1709 445,1709 443,1711 443,5073 444,5072 1754,5072 1752,5070 1752,4674 1755,4671 1873,4671 1874,4670 6855,4670 ; 1694,2110 1694,1773 1916,1773 ; 1699,2110 3619,2110 3615,2114 3615,2897 2622,2897 ; 1902,1776 1924.84,1776 1928,1772.84 1928,2044 1927,2045 2036,2045 2660,2045 2722,1983 2722,1778 2982,1778 3061,1857 3231,2027 3991,2027 3991,1804 3996,1799 4236,1799 4242,1805 4242,2115 5066,2115 5067,2116 5067,2043 5067,1806 5066,1805 5366,1805 5366,2050 5369,2053 6253,2053 6257,2049 6257,1819 6268,1808 6514,1808 6547,1841 6547,2048 6551,2052 7448,2052 7450,2050 7450,1805 7463,1792 7642,1792 7675,1825 7675,1930 7789,2044 8346,2044 8612,1778 8793,1778 8840,1825 8840,1911 8702,2049 8702,3328 9197,3328 9254,3328 9494,3568 9538,3568 9554,3584 9554,3664 9535,3683 9389,3683 9383,3677 9383,3625 9227,3469 9128,3469 8675,3469 8674,3470 8674,3664 8435,3664 8435,3570 8430,3565 8271,3565 ; 1946,2878 1948,2876 ; 2745,3726 2745,3099 2747,3097 3870,3097 3870,2274 3876,2268 4338,2268 4467,2397 4467,2399 ; 2747,3726 4275,3726 4279,3722 4279,3539 4280,3538 4689,3538 4691,3536 4691,4078 4688,4081 4903,4081 6856,4081 6856,4671 ; 3484,2242 1606,2242 1606,1683 1609,1680 2194,1680 2197,1683 2197,1949 2198,1948 2479,1948 2479,1694 2481,1692 3303,1692 3299,1696 3299,1928 3301,1930 3635,1930 3638,1927 3638,1687 4477,1687 4482,1692 4482,1961 4489,1968 4839,1968 4841,1966 4841,1691 4846,1696 5609,1696 5609,1952 5611,1954 5846,1954 5848,1952 5848,1696 5852,1700 6784,1700 6782,1702 6782,1955 6784,1957 7071,1957 7076,1952 7076,1703 7947,1703 7947,1941 7951,1945 8205,1945 8206,1944 8206,1700 8207,1701 9112,1701 9114,1703 9114,1962 9118,1966 9375,1966 9380,1961 9437,1961 9519,2043 9519,3291 9641,3413 9641,3740 9149,3740 9149,3563 9144,3558 8780,3558 8776,3562 8776,3733 8772,3737 8278,3737 8278,3565 8276,3563 8008,3563 ; 3484,2247 3484,2693 3484,2697 2318,2697 2318,3075 2315,3078 1953,3078 1948,3073 1948,2876 ; 6739,4680 6739,5308 7846,5308 7849,5305 7849,5079 7847,5077 7750,5077 7746,5073 7746,4901 ; 7068,3939 7068,4398 7068,4445 7065,4448 7101,4448 7813,4448 7815,4450 7815,4899 7746,4899 ; 4467,2399 4319,2547 4319,2762 4273,2808 4050,2808 3981,2877 3981,3034 4075,3128 4225,3128 4375,3278 4796,3278 4796,3927 4793,3930 7998,3930 7999,3929 7999,2272 7935,2208 5179,2208 4988,2399 4467,2399

## Silkscreen, mask and mechanical layers (free items; w line width, h text height)
Top Overlay:
  text "12V" at 8009,5356 h60
  text "PGND" at 8245,5356 h60
  text "WARN" at 8875,5356 h60
  text "PGND" at 9189,5356 h60
  text "H" at 6856,5337 h60
  text "L" at 7040,5337 h60
  text "H" at 7326,5337 h60
  text "L" at 7513,5337 h60
  text "PGND" at 2358,5329.01 h60
  text "PGND" at 3157,5329.01 h60
  text "PGND" at 3974,5329.01 h60
  text "PGND" at 4780,5329.01 h60
  text "PGND" at 5588,5329.01 h60
  text "PGND" at 6402,5329.01 h60
  text "VCU Dev V1.1" at 308,3955 h100
  text "12V" at 60,3261 h60 r270
  text "3V3" at 7757,3189 h60
  text "RESET" at 7757,3080 h60
  text "PGND" at 58,3059 h60 r270
  text "LIN" at 9804,3028 h60 r90
  text "JTMS" at 7757,2975 h60
  text "C1" at 5345,2902 h60
  text "C0" at 4967,2895 h60
  text "JTCK" at 7757,2887 h60
  text "C3" at 5345,2803 h60
  text "C2" at 4965,2795 h60
  text "GND" at 7757,2785 h60
  text "LIN" at 58,2778 h60 r270
  text "PGND" at 9800,2737 h60 r90
  text "GND" at 4960,2692 h60
  text "3V3" at 5341,2691 h60
  text "3V3" at 7493,2686 h60 r270
  text "3V3" at 7395,2685 h60 r270
  text "3V3" at 7594,2684 h60 r270
  text "H9" at 7284,2655 h60 r270
  text "H7" at 7191,2654 h60 r270
  text "B11" at 7088,2653 h60 r270
  text "12V" at 9800,2510 h60 r90
  text "B10" at 7092,2290 h60 r270
  text "GND" at 7403,2290 h60 r270
  text "H6" at 7200,2289 h60 r270
  text "GND" at 7504,2289 h60 r270
  text "H8" at 7309,2288 h60 r270
  text "GND" at 7604,2288 h60 r270
  text "PGND" at 5694,116 h60
  text "PGND" at 6145,110 h60
  text "PGND" at 6594,110 h60
  text "PGND" at 7622,110 h60
  text "PGND" at 1326,93 h60
  text "HORN" at 9200,57 h60
  text "PGND" at 8918,55 h60
  text "PGND" at 2601,46 h60
  text "PGND" at 4314,43 h60
  text "PGND" at 423,34 h60
Mechanical 13:
  lines w10: -1.03,1.03 0.03,-0.03